# Allegro board ClassDAmp.brd
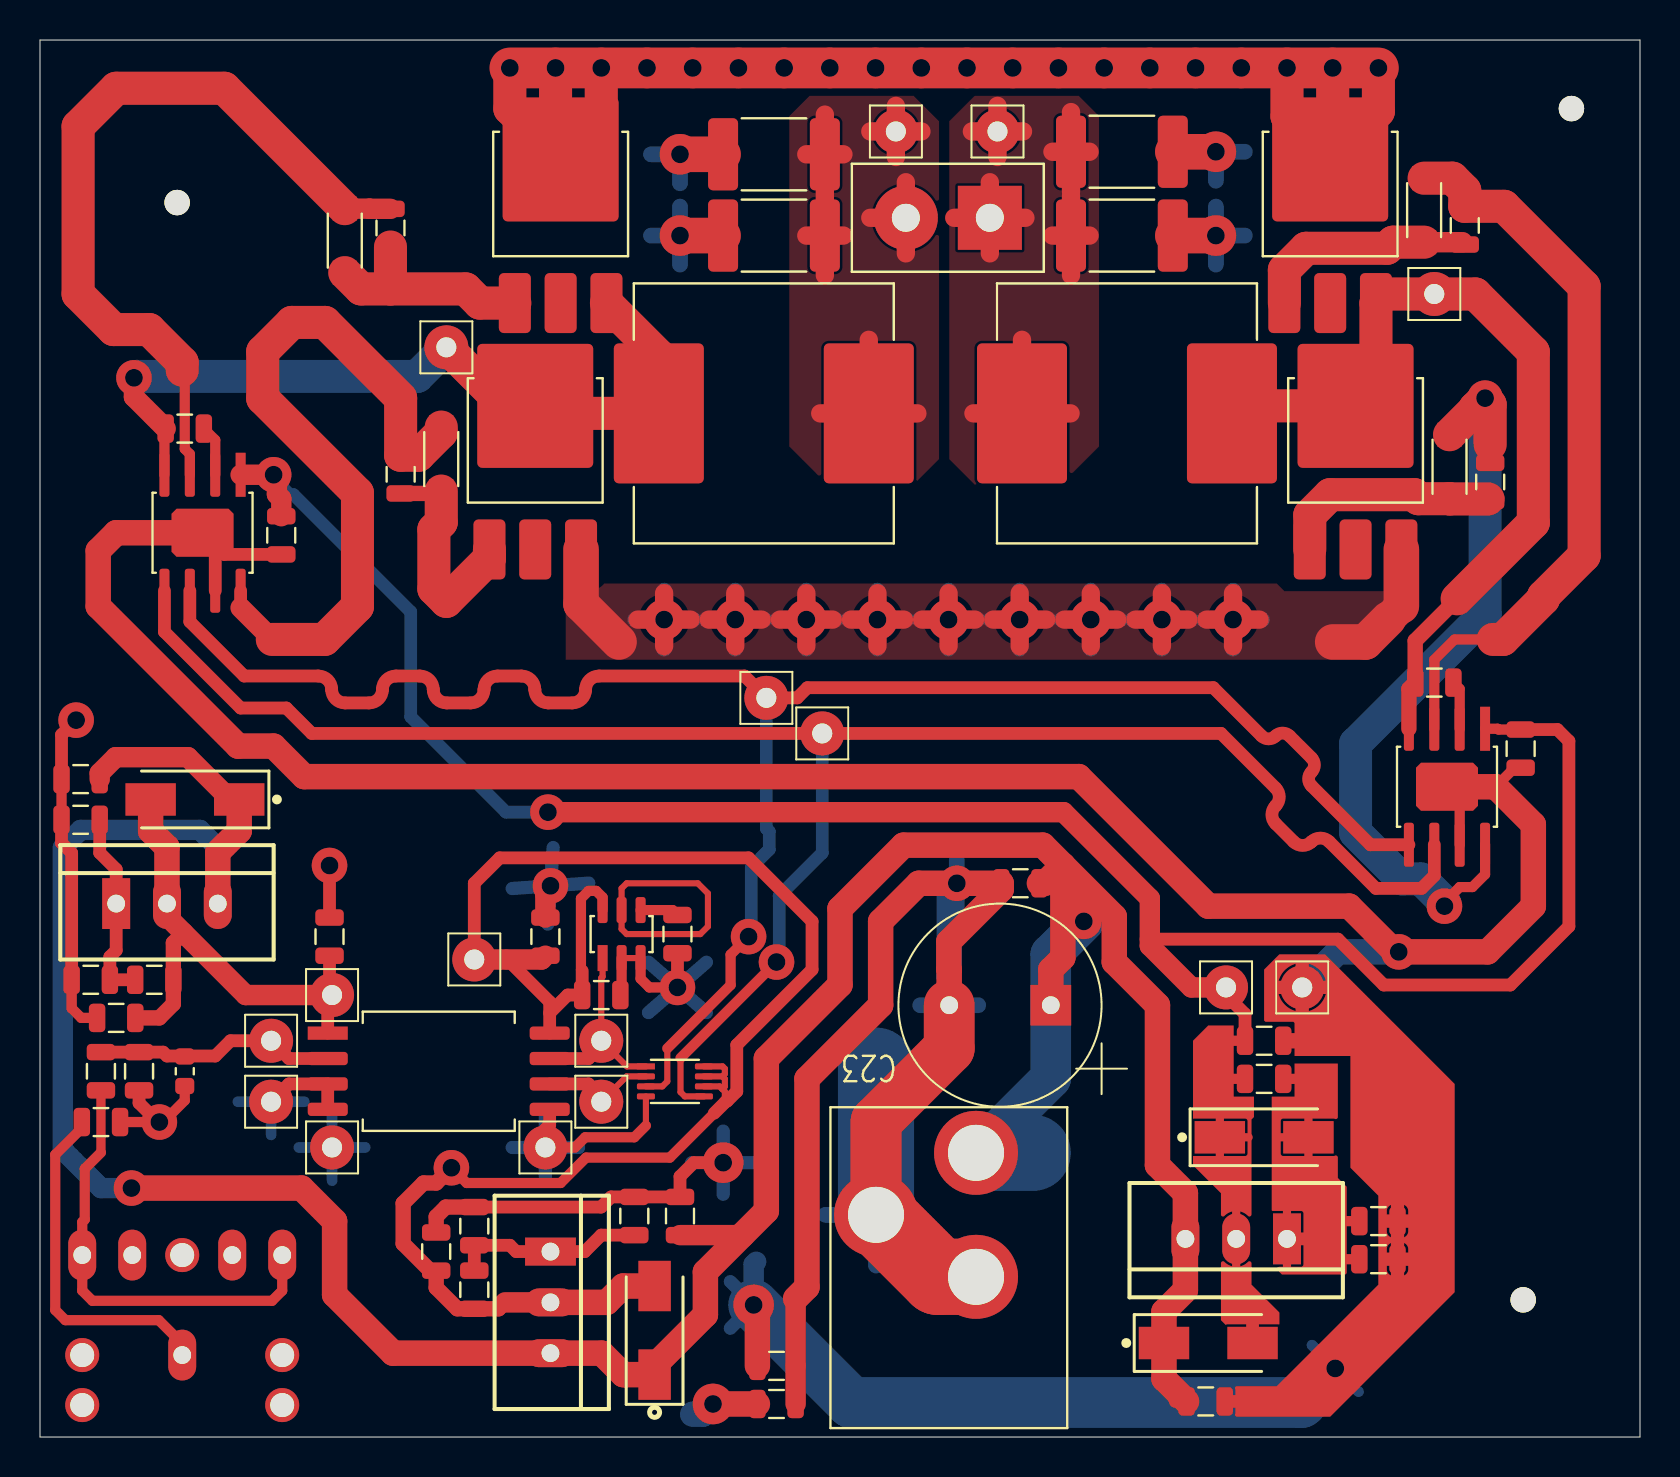
[diagram p0: board, top side]
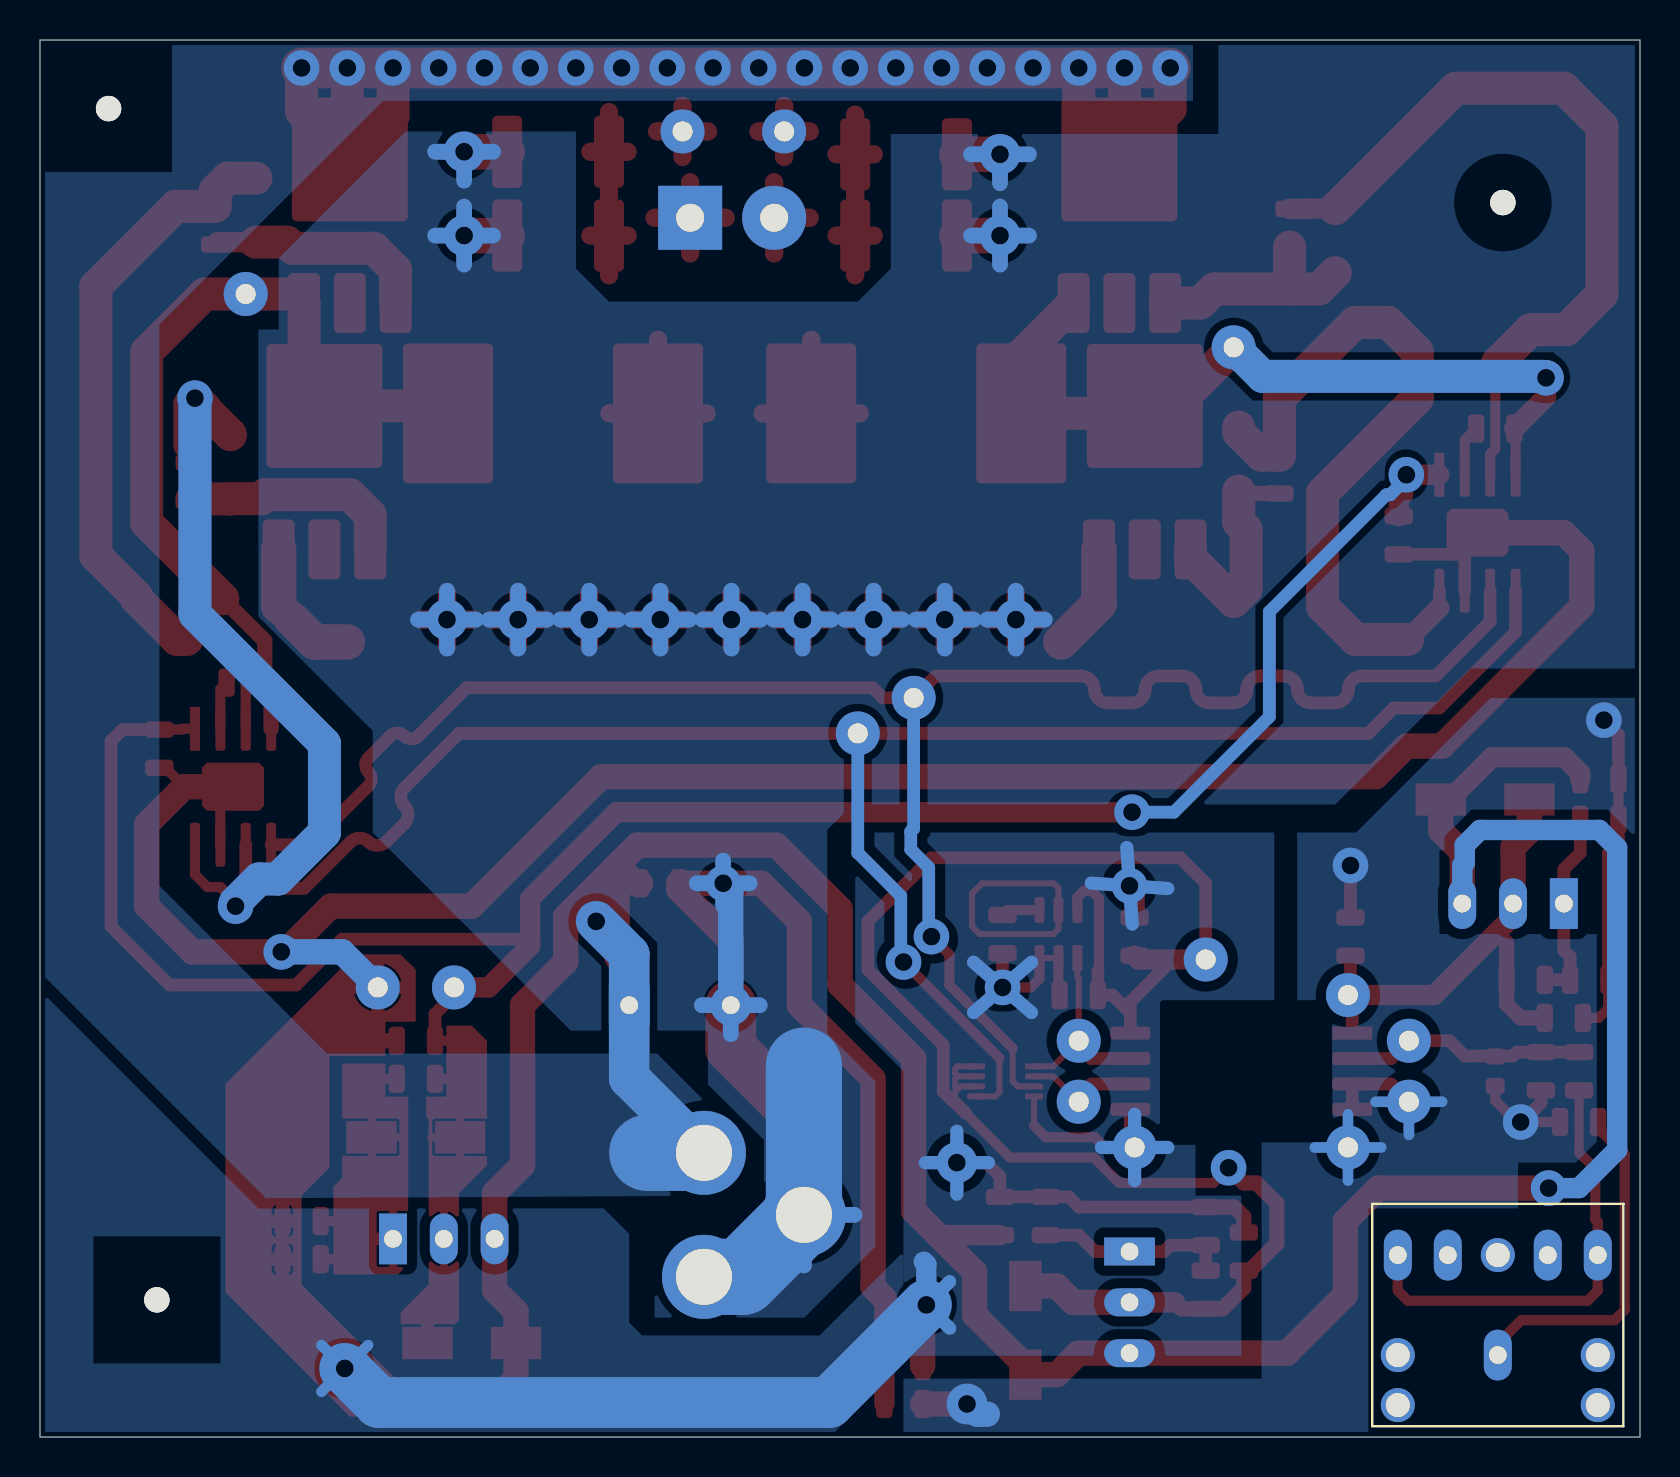
[diagram p1: board, bottom side, seen from below]

Outline 80.01 x 69.85 mm; copper layers: TOP, LAYER2, LAYER3, BOTTOM. Coordinates in mm from the lower left corner of the outline.
Outline path: 0,69.85 0,0 80.01,0 80.01,69.85 0,69.85

## Design rules (mm)
constraint set DEFAULT: min track width 0.152

## Placement (name value [footprint] x y rotation side)
C1  1n  [R0603RESC157X85X50L30N]  7.24 18.29 90 top
C2  100n  [R0805RESC200X125X50L30N]  14.48 25.02 90 top
C3  100n  [R0805RESC200X125X50L30N]  25.27 25.02 90 top
C4  100n  [R0805RESC200X125X50L30N]  28.07 22.1 180 top
C5  470n  [R0805RESC200X125X50L30N]  12.06 45.09 90 top
C6  470n  [R0805RESC200X125X50L30N]  74.04 34.42 90 top
C7  22n  [R0805RESC200X125X50L30N]  69.72 37.72 0 top
C8  22n  [R0805RESC200X125X50L30N]  7.24 50.42 180 top
C9  220n  [CAPC450X320X320L25]  36.7 64.14 0 top
C10  220n  [CAPC450X320X320L25]  54.1 64.26 180 top
C11  DNF  [CAPC450X320X320L25]  36.7 60.07 0 top
C12  DNF  [CAPC450X320X320L25]  54.1 60.07 180 top
C13  100n  [R0805RESC200X125X50L30N]  58.29 1.78 0 top
C14  1u  [R0805RESC200X125X50L30N]  61.21 19.81 0 top
C15  10u  [R0805RESC200X125X50L30N]  66.93 10.79 0 top
C16  100nF  [R0805RESC200X125X50L30N]  2.03 32.89 180 top
C17  1u  [R0805RESC200X125X50L30N]  3.81 20.95 180 top
C18  10u  [R0805RESC200X125X50L30N]  2.54 22.86 180 top
C19  1u  [R0805RESC200X125X50L30N]  19.81 9.27 90 top
C20  100n  [R0805RESC200X125X50L30N]  32 11.05 90 top
C21  10u  [R0805RESC200X125X50L30N]  21.72 10.54 90 top
C22  100n  [R0805RESC200X125X50L30N]  49.02 27.69 180 top
C23  100u  [GU-CAPCYL200]  50.55 21.59 180 top
D1  1N4148W  [GU-SOD-123FL]  15.24 59.82 270 top
D2  1N4148W  [GU-SOD-123FL]  20.07 48.9 270 top
D3  1N4148W  [GU-SOD-123FL]  70.48 48.51 270 top
D4  1N4148W  [GU-SOD-123FL]  69.22 61.34 270 top
D5  S1B  [DO-214AC]  61.21 14.99 0 top
D6  S1B  [DO-214AC]  58.42 4.7 0 top
D7  S1B  [DO-214AC]  30.73 5.33 90 top
D9  S1B  [DO-214AC]  7.75 31.88 180 top
J3  30V  [CLIFF_DC-10A_P]  51.31 0.51 90 top
J5  Output  [RHDRV2W140P420_550_2X1_960X5-1]  47.5 60.96 180 top
L1  10u  [INDM1270X1270X850L230X500]  36.2 51.18 0 top
L2  10u  [INDM1270X1270X850L230X500]  54.36 51.18 180 top
NOREF  -  [unnamed]  74.17 6.86 0 top
NOREF#2  -  [unnamed]  76.58 66.42 0 top
NOREF#3  -  [unnamed]  6.86 61.72 0 top
R1  2k  [R0805RESC200X125X50L30N]  3.05 18.29 90 top
R2  1k  [R0805RESC200X125X50L30N]  4.95 18.29 270 top
R3  2k  [R0805RESC200X125X50L30N]  3.05 15.75 0 top
R4  -  [R0805RESC200X125X50L30N]  31.88 25.15 90 top
R5  10  [R0805RESC200X125X50L30N]  17.53 60.45 270 top
R6  10  [R0805RESC200X125X50L30N]  18.03 48.13 270 top
R7  10  [R0805RESC200X125X50L30N]  71.25 60.58 90 top
R8  10  [R0805RESC200X125X50L30N]  72.52 47.75 90 top
R9  1.65k  [R0805RESC200X125X50L30N]  66.93 8.89 0 top
R10  240  [R0805RESC200X125X50L30N]  61.21 17.91 0 top
R11  240  [R0805RESC200X125X50L30N]  21.72 7.37 90 top
R12  390  [R0805RESC200X125X50L30N]  29.72 11.05 90 top
R13  240  [R0805RESC200X125X50L30N]  5.71 22.86 180 top
R14  715  [R0805RESC200X125X50L30N]  2.03 30.86 180 top
R15  SHORT  [R0805RESC200X125X50L30N]  36.83 1.65 180 top
R17  SHORT  [R0805RESC200X125X50L30N]  36.83 3.56 180 top
T1  VinP  [TESTPOINT]  11.56 19.81 0 top
T2  VinN  [TESTPOINT]  11.56 16.76 0 top
T3  test_point_0  [TESTPOINT]  14.61 22.1 0 top
T4  test_point_0  [TESTPOINT]  14.61 14.48 0 top
T5  test_point_0  [TESTPOINT]  21.72 23.88 0 top
T6  test_point_0  [TESTPOINT]  25.27 14.48 0 top
T7  CLK  [TESTPOINT]  28.07 19.81 0 top
T8  test_point_0  [TESTPOINT]  28.07 16.76 0 top
T9  SIGNAL+  [TESTPOINT]  39.12 35.18 90 top
T10  SIGNAL-  [TESTPOINT]  36.32 36.96 90 top
T11  PREFILTER+  [TESTPOINT]  20.32 54.48 0 top
T12  PREFILTER-  [TESTPOINT]  69.72 57.15 0 top
T13  SIGNAL+  [TESTPOINT]  42.8 65.28 0 top
T14  SIGNAL-  [TESTPOINT]  47.88 65.28 0 top
T15  test_point_0  [TESTPOINT]  59.31 22.48 0 top
T16  test_point_0  [TESTPOINT]  63.12 22.48 0 top
U1  PHONEJACK STEREO SW  [3-5MM-STEREO-20-0137]  7.11 6.1 90 bottom
U2  AMC1204  [SOIC8P127_585X1150X280L75X41]  19.94 18.29 270 top
U3  LTC6907  [SOT23-6P95_270X145L35X42]  29.08 25.15 0 top
U4  NC7SV74  [SOP8P50_200X310X80L25X22]  31.75 17.78 270 top
U5  UCC27211  [SOIC9P127_490X600X170L83X41T-1]  8.13 45.21 180 top
U6  UCC27211  [SOIC9P127_490X600X170L83X41T-1]  70.36 32.51 180 top
U7  MOSFET - NVD5C684NL  [DPAK4P229_990X238L159X76T480-1]  65.79 48.77 0 top
U8  MOSFET - NVD5C684NL  [DPAK4P229_990X238L159X76T480-1]  24.77 48.77 0 top
U9  MOSFET - NVD5C684NL  [DPAK4P229_990X238L159X76T480-1]  26.04 61.09 0 top
U10  MOSFET - NVD5C684NL  [DPAK4P229_990X238L159X76T480-1]  64.52 61.09 0 top
U11  LM317M  [GU-TO220AB]  62.36 9.91 180 top
U12  LM317M  [GU-TO220AB]  25.53 9.27 270 top
U13  LM317M  [GU-TO220AB]  3.81 26.67 0 top

## Library data of the parts
C1-C14 C16 C17 C19 C20 = CAP NP
C15 C18 C21 C22 = CAPACITOR NON-POL
C23 = CAPACITOR POL
D1 = DIODE_2
D2 = DIODE_3
D3 = DIODE_5
D4 = DIODE_4
D5-D7 D9 = DIODE PIN_0
J3 = CON3
J5 = HEADER 2
L1 L2 = INDUCTOR
R1-R3 R5-R15 R17 = R
R4 = R_R0805RESC200X125X50L30N_200K
T1-T16 = test_point_0
U1 = PHONEJACK STEREO SW_0
U2 = AMC1204
U3 = LTC6907
U4 = NC7SV74
U5 U6 = UCC27211_2
U7-U10 = MOSFET - NVD5C684NL_1
U11-U13 = LM317M_0

## Footprints (pads in the part's own frame, mm; a bottom-side part is the same pattern mirrored in y, then rotated)
3-5MM-STEREO-20-0137
  round 1.7 hole 1.2: (-4.5,-5) (-4.5,5) (-2,-5) (-2,5) (3,0)
  oval 2.54x1.397 hole 0.889: 1(-2,0) 2(3,5) 3(3,2.5) 4(3,-2.5) 5(3,-5)
CAPC450X320X320L25
  rrect 1.5x3.61 smd: 1(-2.545,0) 2(2.545,0)
CLIFF_DC-10A_P
  round 4.2 hole 2.8: 1(13.7,4.5) 2(10.6,9.5) 3(7.5,4.5)
DO-214AC
  rect 2.52x1.62 smd: A(2.215,0) C(-2.215,0)
DPAK4P229_990X238L159X76T480-1
  rrect 1.6x3 smd: 1(-2.29,-4.39) 2(0,-4.39) 3(2.29,-4.39)
  rrect 5.8x6.2 smd: 4(0,2.79)
GU-CAPCYL200
  rect 2.032x2.032 hole 0.889: 1(0,0)
  round 2.032 hole 0.889: 2(5.08,0)
GU-SOD-123FL
  rect 1.2x1.2 smd: A(1.6,0) C(-1.6,0)
GU-TO220AB
  rect 1.397x2.54 hole 0.889: 1(0,0)
  oval 1.397x2.54 hole 0.889: 2(2.54,0) 3(5.08,0)
INDM1270X1270X850L230X500
  rrect 4.5x7 smd: 1(-5.25,0) 2(5.25,0)
R0603RESC157X85X50L30N
  rrect 0.81x0.95 smd: 1(-0.74,0) 2(0.74,0)
R0805RESC200X125X50L30N
  rrect 0.82x1.42 smd: 1(-0.955,0) 2(0.955,0)
RHDRV2W140P420_550_2X1_960X5-1
  rect 3.2x3.2 hole 1.4: 1(0,0)
  round 3.2 hole 1.4: 2(4.2,0)
SOIC8P127_585X1150X280L75X41
  rect 0.66x2 smd: 1(-1.905,-5.55)
  rrect 0.66x2 smd: 2(-0.635,-5.55) 3(0.635,-5.55) 4(1.905,-5.55) 5(1.905,5.55) 6(0.635,5.55) 7(-0.635,5.55) 8(-1.905,5.55)
SOIC9P127_490X600X170L83X41T-1
  rect 0.5x2.2 smd: 1(-1.905,-2.9)
  rrect 0.5x2.2 smd: 2(-0.635,-2.9) 3(0.635,-2.9) 4(1.905,-2.9) 5(1.905,2.9) 6(0.635,2.9) 7(-0.635,2.9) 8(-1.905,2.9)
  rrect 3.1x2.4 smd: 9(0,0)
SOP8P50_200X310X80L25X22
  rect 0.3x0.9 smd: 1(-0.75,-1.45)
  rrect 0.3x0.9 smd: 2(-0.25,-1.45) 3(0.25,-1.45) 4(0.75,-1.45) 5(0.75,1.45) 6(0.25,1.45) 7(-0.25,1.45) 8(-0.75,1.45)
SOT23-6P95_270X145L35X42
  rect 0.5x1.3 smd: 1(-0.95,-1.2)
  rrect 0.5x1.3 smd: 2(0,-1.2) 3(0.95,-1.2) 4(0.95,1.2) 5(0,1.2) 6(-0.95,1.2)
TESTPOINT
  round 2.2 hole 1: 1(0,0)
unnamed
  round 1.27 hole 3.962 unplated: (0,0)

## Nets
3V3: C3.1 C4.2 C19.1 D7.A R11.1 T5.1 U2.8 U3.6(V+) U4.6 U4.7 U4.8(VCC) U12.2(OUTPUT)
5V: C2.1 C17.1 D9.A R13.1 T3.1 U2.1 U13.2(OUTPUT)
10V: C5.2 C6.2 C14.1 D5.C(K) D6.A R10.1 T15.1 U5.1 U6.1 U11.2(OUTPUT)
GND1: C1.1 C2.2 C16.2 C17.2 C18.2 R2.2 R3.2 R14.2 R15.2 T2.1 T4.1 U2.3 U2.4
GND2: C9.1 C10.1 C11.1 C12.1 C22.2 C23.2 J3.2 J3.3 R15.1 R17.1 U7.3(S) U8.3(S)
GND3: C3.2 C4.1 C5.1 C6.1 C13.2 C14.2 C15.2 C19.2 C20.2 C21.2 R4.1 R9.2 R12.2 R17.2 T6.1 T16.1 U2.5 U3.2 U3.3 U4.4 U5.7(VSS) U5.9 U6.7(VSS) U6.9
+V_RAIL: C13.1 C16.1 C20.1 C22.1 C23.1 D6.C(K) D7.C(K) D9.C(K) J3.1 U9.4 U10.4 U11.3 U12.3 U13.3
CLK: T7.1 U2.7 U3.1 U4.1
D: U7.2 U8.2 U9.2 U10.2
MOD_SIGNAL: T8.1 U2.6 U4.2
PREFILTER+: C8.2 L1.1 T11.1 U5.4 U8.4 U9.3(S)
PREFILTER-: C7.1 L2.1 T12.1 U6.4 U7.4 U10.3(S)
SIGNAL+: T9.1 U4.5 U5.5 U6.6
SIGNAL-: T10.1 U4.3 U5.6 U6.5
N08313: R1.1 U1.2 U1.5
N08317: R3.1 U1.1(E)
N08321: C1.2 R1.2 R2.1 T1.1 U2.2(VINP)
N11549: R4.2 U3.4
N14416: D3.C(K) R8.2 U6.8
N14431: D4.C(K) R7.2 U6.3
N14441: D1.C(K) R5.1 U5.3
N14452: D2.C(K) R6.1 U5.8
N14665: D4.A R7.1 U10.1
N14669: D3.A R8.1 U7.1
N14687: D1.A R5.2 U9.1
N14691: D2.A R6.2 U8.1
N16540: C8.1 U5.2
N16584: C7.2 U6.2
N20136: C9.2 C11.2 J5.2 L1.2 T13.1
N20333: C10.2 C12.2 J5.1 L2.2 T14.1
N24103: C15.1 D5.A R9.1 R10.2 U11.1
N25160: C21.1 R11.2 R12.1 U12.1
N25746: C18.1 R13.2 R14.1 U13.1

Pads without a net: U1 3 4; U3 5

## Via types
v1: diameter 1.778, hole 0.889, TOP to BOTTOM, 37 vias
v2: diameter 2.032, hole 0.889, TOP to BOTTOM, 17 vias

## Routing (per net, layer and track width the routed paths; a pad name or vN(x,y) marks a point on that pad's centre or on a via; arc(x,y) is an arc through that point)
3V3: length 91.1
  TOP w0.305: 34.12,17.4 34.25,17.27 34.25,16.72 ; 34.12,17.4 34.25,17.53 34.25,17.91 34.12,18.03 ; 34.12,17.4 33.99,17.53 U4.6 ; 34.12,18.03 34.25,18.15 34.25,18.41 34.13,18.53 U4.8 ; 34.12,18.03 U4.7
  TOP w0.508: 27.11,23.31 27.05,23.37 27.05,26.92 27.43,27.3 27.81,27.3 28.13,26.98 U3.6 ; 33.72,16.19 31.5,13.97 27.3,13.97 26.04,12.7 21.34,12.7 v1(20.57,13.46)
  TOP w0.635: 27.11,23.31 C4.2 26.38,22.1 25.49,21.2 ; T5.1 21.72,27.69 22.99,28.96 35.43,28.96 38.61,25.78 38.61,23.37 34.84,19.6 34.84,17.28 34.37,16.8 34.33,16.8 33.72,16.19 ; 23.26,23.88 23.37,23.88 25.49,21.76 25.49,21.2 ; 25.49,21.2 U2.8
  TOP w0.762: 23.26,6.73 22.94,6.41 R11.1 20.87,6.41 19.81,7.47 C19.1 19.51,8.32 18.16,9.67 18.16,11.68 19.18,12.7 19.81,12.7 v1(20.57,13.46)
  TOP w1.016: C3.1 25.09,23.88 23.37,23.88 ; T5.1 23.26,23.88 ; 23.26,6.73 U12.2
  TOP w1.27: U12.2 28.34,6.73 29.16,7.55 D7.A
5V: length 26.4
  TOP w0.635: 14.73,22.1 T3.1 ; 14.73,22.1 14.39,21.76 U2.1 ; 14.73,22.1 14.48,22.35 C2.1
  TOP w0.762: 7.18,25.21 6.67,24.7 R13.1 6.67,21.66 5.97,20.95 C17.1
  TOP w1.016: T3.1 10.29,22.1 6.22,26.16 6.22,26.54 U13.2
  TOP w1.27: U13.2 6.35,29.49 5.53,30.3 D9.A
10V: length 116.4
  TOP w0.406: 59.82,11.35 U11.2 59.82,8.46 ; 59,14 D5.C ; D5.C 60.44,14.99 ; D5.C 59,15.97
  TOP w0.508: C6.2 72.93,35.37 72.89,35.41 U6.1 ; C14.1 59.05,19.81 ; R10.1 59.05,17.91
  TOP w0.635: C14.1 60.26,21.15 59.31,22.1 T15.1 ; D6.A 60.63,5.79 ; C6.2 75.88,35.37 76.45,34.8 76.45,25.53 73.53,22.6 67.2,22.6 64.9,24.89 55.5,24.89
  TOP w1.016: T15.1 57.57,22.48 55.5,24.55 55.5,26.92 51.18,31.24 v1(25.4,31.24) ; C5.2 12.06,46.92 11.85,47.14 11.85,47.76 11.68,47.92 v1(11.68,48.11) U5.1
  BOTTOM w0.635: v1(11.68,48.11) 11.68,47.92 12.49,47.11 12.68,47.11 18.54,41.26 18.54,36.01 23.3,31.24 v1(25.4,31.24)
GND1: length 44.9
  TOP w0.508: R14.2 C16.2 ; C17.2 2.06,20.95 1.58,21.43 C18.2 ; C1.1 7.24,16.83 6.16,15.75 v1(5.97,15.75) R3.2
  TOP w0.635: v1(1.81,35.84) 1.08,35.11 C16.2 ; U2.4 U2.3 12.45,17.65 T2.1 ; R14.2 1.08,29.71 1.58,29.2 C18.2 ; C2.2 v1(14.48,28.57) ; 5.9,15.75 4.95,16.7 R2.2
  TOP w1.27: R15.2 v2(33.66,1.65)
  BOTTOM w0.533: T4.1 16.26,14.48 ; T4.1 12.95,14.48 ; T4.1 14.61,16.14 ; T4.1 14.61,12.82 ; 11.56,15.1 T2.1 ; T2.1 13.22,16.76 ; T2.1 9.9,16.76
  BOTTOM w1.27: 32.64,1.14 33.15,1.14 v2(33.66,1.65)
GND2: length 233.5
  TOP w0.914: 38.32,39.55 v2(38.32,40.87) ; v2(38.32,40.87) 39.64,40.87 ; v2(38.32,40.87) 38.32,42.19 ; v2(38.32,40.87) 37,40.87 ; 29.89,40.87 v2(31.21,40.87) ; v2(31.21,40.87) 31.21,39.55 ; v2(31.21,40.87) 32.53,40.87 ; v2(31.21,40.87) 31.21,42.19 ; v2(48.99,40.87) 50.31,40.87 ; v2(48.99,40.87) 48.99,42.19 ; v2(48.99,40.87) 48.99,39.55 ; v2(48.99,40.87) 47.67,40.87 ; v2(52.55,40.87) 52.55,42.19 ; v2(52.55,40.87) 51.22,40.87 ; v2(52.55,40.87) 52.55,39.55 ; v2(52.55,40.87) 53.87,40.87 ; v2(34.77,40.87) 36.09,40.87 ; v2(34.77,40.87) 34.77,39.55 ; v2(34.77,40.87) 33.44,40.87 ; v2(34.77,40.87) 34.77,42.19 ; v2(56.1,40.87) 57.42,40.87 ; v2(56.1,40.87) 56.1,39.55 ; v2(56.1,40.87) 54.78,40.87 ; v2(56.1,40.87) 56.1,42.19 ; v2(45.43,40.87) 46.76,40.87 ; v2(45.43,40.87) 45.43,42.19 ; v2(45.43,40.87) 44.11,40.87 ; v2(45.43,40.87) 45.43,39.55 ; 41.88,39.55 v2(41.88,40.87) ; v2(41.88,40.87) 43.2,40.87 ; v2(41.88,40.87) 40.56,40.87 ; v2(41.88,40.87) 41.88,42.19 ; v2(59.66,40.87) 59.66,42.19 ; v2(59.66,40.87) 59.66,39.55 ; v2(59.66,40.87) 60.98,40.87 ; v2(59.66,40.87) 58.34,40.87
  TOP w1.016: 37.79,6.92 R17.1 37.79,1.65
  TOP w1.27: C23.2 45.47,23.37 45.45,23.39 45.45,24.77 48.07,27.39 C22.2 v1(45.85,27.69) 43.94,27.69 42.04,25.78 42.04,21.59 38.35,17.91 38.35,7.49 37.79,6.92
  TOP w1.651: 67.42,40.89 68.08,41.55
  TOP w1.778: 64.64,39.75 66.28,39.75 67.42,40.89 ; C11.1 v2(32,60.07) ; 68.08,41.55 U7.3 ; U8.3 27.06,41.65 28.96,39.75 ; C12.1 v2(58.8,60.07) ; C9.1 v2(32,64.14) ; C10.1 v2(58.8,64.26)
  TOP w2.54: J3.2 41.81,15.77 45.47,19.43 C23.2
  TOP w3.81: J3.2 44.91,8.01 J3.3
  BOTTOM w0.787: v2(52.55,40.87) 52.55,42.32 ; v2(52.55,40.87) 52.55,39.42 ; v2(52.55,40.87) 53.99,40.87 ; v2(52.55,40.87) 51.1,40.87 ; 48.99,39.42 v2(48.99,40.87) ; v2(48.99,40.87) 47.54,40.87 ; v2(48.99,40.87) 50.44,40.87 ; v2(48.99,40.87) 48.99,42.32 ; v2(38.32,40.87) 39.77,40.87 ; v2(38.32,40.87) 36.87,40.87 ; v2(38.32,40.87) 38.32,42.32 ; v2(38.32,40.87) 38.32,39.42 ; 32,58.62 v2(32,60.07) ; v2(32,60.07) 32,61.52 ; v2(32,60.07) 33.45,60.07 ; v2(32,60.07) 30.56,60.07 ; 44.53,27.69 v1(45.85,27.69) ; v1(45.85,27.69) 47.17,27.69 ; v1(45.85,27.69) 45.85,28.82 ; v1(45.85,27.69) 45.85,26.56 ; 32,62.69 v2(32,64.14) ; v2(32,64.14) 33.45,64.14 ; v2(32,64.14) 30.56,64.14 ; v2(58.8,64.26) 60.25,64.26 ; v2(58.8,64.26) 58.8,62.81 ; v2(58.8,64.26) 57.35,64.26 ; v2(31.21,40.87) 32.66,40.87 ; v2(31.21,40.87) 31.21,42.32 ; v2(31.21,40.87) 29.76,40.87 ; v2(31.21,40.87) 31.21,39.42 ; 45.47,20.14 C23.2 ; C23.2 44.02,21.59 ; C23.2 46.91,21.59 ; 56.1,39.42 v2(56.1,40.87) ; v2(56.1,40.87) 56.1,42.32 ; v2(56.1,40.87) 57.55,40.87 ; v2(56.1,40.87) 54.65,40.87 ; 43.99,40.87 v2(45.43,40.87) ; v2(45.43,40.87) 46.88,40.87 ; v2(45.43,40.87) 45.43,42.32 ; v2(45.43,40.87) 45.43,39.42 ; 40.43,40.87 v2(41.88,40.87) ; v2(41.88,40.87) 41.88,42.32 ; v2(41.88,40.87) 43.33,40.87 ; v2(41.88,40.87) 41.88,39.42 ; v2(34.77,40.87) 36.21,40.87 ; v2(34.77,40.87) 34.77,39.42 ; v2(34.77,40.87) 34.77,42.32 ; v2(34.77,40.87) 33.32,40.87 ; 58.21,40.87 v2(59.66,40.87) ; v2(59.66,40.87) 59.66,42.32 ; v2(59.66,40.87) 59.66,39.42 ; v2(59.66,40.87) 61.11,40.87 ; v2(58.8,60.07) 60.25,60.07 ; v2(58.8,60.07) 58.8,58.62 ; v2(58.8,60.07) 58.8,61.52 ; v2(58.8,60.07) 57.35,60.07 ; 39.28,11.11 J3.2 41.81,8.58
  BOTTOM w1.27: v1(45.85,27.69) 45.47,27.3 C23.2
  BOTTOM w3.81: J3.3 44.91,8.01 J3.2 41.81,18.57
GND3: length 237.7
  TOP w0.305: 30.3,15.57 U4.4 ; U3.2 U3.3
  TOP w0.508: C6.1 73.74,33.46 72.79,32.51 ; U3.2 29.08,22.16 C4.1 ; v1(31.88,22.48) 30.47,22.48 30.03,22.92 U3.3 ; U6.9 70.99,31.88 70.99,29.61 ; 30.3,15.57 29.72,14.99 27.26,14.99 26.75,14.48 T6.1
  TOP w0.635: U2.5 25.49,15.61 25.27,15.39 T6.1 ; 63.21,19.81 63.88,19.81 ; v1(31.88,22.48) R4.1 ; 8.76,44.58 9.21,44.13 C5.1 ; 8.76,44.58 U5.9 ; 8.76,44.58 U5.7 ; C21.2 28.06,11.5 28.56,12 R12.2 C20.2 32,13.03 32.69,13.72 v2(34.16,13.72) ; C13.2 60.45,1.78
  TOP w0.66: 61.84,22.48 T16.1 ; T16.1 63.12,21.2 ; T16.1 64.4,22.48 ; T16.1 63.12,23.76 ; R9.2 67.88,9.78 ; R9.2 67.3,8.89 ; R9.2 68.47,8.89 ; R9.2 67.88,8 ; C15.2 68.47,10.79 ; C15.2 67.88,9.91 ; C15.2 67.3,10.79 ; C15.2 67.88,11.68
  TOP w0.762: v1(25.53,27.56) 25.53,27.36 25.27,27.1 ; 63.21,19.81 C14.2 ; C19.2 19.81,11.02 20.29,11.5 C21.2
  TOP w1.016: C3.2 25.27,27.3 v1(25.53,27.56)
  TOP w1.27: v2(35.69,6.6) 35.87,6.42 R17.2 ; U5.9 3.81,45.21 2.91,44.31 2.91,41.54 9.91,34.54 11.68,34.54 13.21,33.02 51.94,33.02 58.42,26.54 65.47,26.54 67.75,24.26 v1(67.94,24.26) 72.39,24.26 74.68,26.54 74.68,30.63 72.79,32.51 U6.9
  BOTTOM w0.533: v2(64.77,3.43) 65.93,2.26 ; v2(64.77,3.43) 65.93,4.59 ; v2(64.77,3.43) 63.61,4.59
  BOTTOM w0.66: 34.16,12.14 v2(34.16,13.72) ; v2(34.16,13.72) 35.74,13.72 ; v2(34.16,13.72) 32.59,13.72 ; v2(34.16,13.72) 34.16,15.29 ; 23.61,27.42 v1(25.53,27.56) ; v1(25.53,27.56) 25.66,29.47 ; v1(25.53,27.56) 25.39,25.65 ; v1(25.53,27.56) 27.44,27.69 ; T6.1 25.27,16.14 ; T6.1 26.93,14.48 ; T6.1 23.61,14.48 ; T6.1 25.27,12.82 ; v1(31.88,22.48) 33.33,21.22 ; v1(31.88,22.48) 33.33,23.74 ; v1(31.88,22.48) 30.43,23.74 ; v1(31.88,22.48) 30.43,21.22 ; 34.52,7.77 v2(35.69,6.6) 34.52,5.44
  BOTTOM w1.016: 35.81,8.76 35.69,8.64 v2(35.69,6.6)
  BOTTOM w1.27: T16.1 64.9,24.26 v1(67.94,24.26)
  BOTTOM w2.54: v2(64.77,3.43) 63.06,1.72 40.57,1.72 v2(35.69,6.6)
+V_RAIL: length 253.6
  TOP w0.508: 51.15,27.3 50.77,27.69 50.25,27.69
  TOP w0.635: C13.1 56.77,1.78
  TOP w1.016: 35.11,10.09 C20.1 ; C16.1 2.99,33.19 3.78,33.99 7.4,33.99 9.51,31.88 D9.C
  TOP w1.27: C22.1 50.25,27.69 51.15,28.59 ; v1(4.57,12.45) 13.08,12.45 14.73,10.79 14.73,7.11 17.65,4.19 U12.3 28.09,4.19 29.16,3.12 D7.C 30.73,3.57 33.27,6.11 33.27,8.26 36.32,11.3 36.32,18.92 40.01,22.61 40.01,26.42 43.18,29.59 50.15,29.59 51.15,28.59 ; D9.C 9.96,30.3 8.89,29.23 U13.3 ; 51.15,27.3 52.2,26.26 v1(52.2,25.78) ; 51.15,27.3 51.15,28.59 ; 51.15,27.3 51.15,23.97 50.55,23.37 C23.1 ; 51.15,28.59 53.72,26.02 53.72,23.75 55.88,21.59 55.88,13.59 57.28,12.19 U11.3 57.28,7.34 56.21,6.27 D6.C 56.21,2.91 C13.1
  TOP w1.651: 64.64,64 66.93,66.29 v1(66.93,68.45) ; 64.64,64 U10.4 62.36,66.04 v1(62.36,68.45) ; 64.64,64 v1(64.64,68.45) ; 25.78,64.13 v1(25.78,68.45) ; 25.78,64.13 U9.4 28.07,65.91 v1(28.07,68.45) ; 25.78,64.13 23.5,66.42 v1(23.5,68.45)
  TOP w2.032: v1(66.93,68.45) v1(64.64,68.45) v1(62.36,68.45) v1(60.07,68.45) v1(57.78,68.45) v1(55.5,68.45) v1(53.21,68.45) v1(50.93,68.45) v1(48.64,68.45) v1(46.35,68.45) v1(44.07,68.45) v1(41.78,68.45) v1(39.5,68.45) v1(37.21,68.45) v1(34.92,68.45) v1(32.64,68.45) v1(30.35,68.45) v1(28.07,68.45) v1(25.78,68.45) v1(23.5,68.45)
  BOTTOM w1.016: U13.3 8.89,28.57 8.76,28.7 8.76,29.59 8,30.35 2.03,30.35 1.14,29.46 1.14,14.35 3.05,12.45 v1(4.57,12.45)
  BOTTOM w2.032: J3.1 50.55,17.95 C23.1 50.55,24.13 v1(52.2,25.78)
  BOTTOM w3.81: J3.1 49.64,14.21
CLK: length 10
  TOP w0.305: U3.1 28.13,23.02 28.07,22.95 T7.1 29.35,18.53 U4.1
  TOP w0.635: U2.7 27.43,18.92 28.07,19.56 T7.1
MOD_SIGNAL: length 5.9
  TOP w0.305: T8.1 29.33,18.03 U4.2
  TOP w0.635: T8.1 28.07,17.02 27.43,17.65 U2.6
Net_35: length 12.9
  TOP w0.305: 32.89,27.69 29.34,27.69 29.08,27.43 29.08,26.35 29.08,25.4 29.34,25.15 33.02,25.15 33.4,25.53 33.4,27.18 32.89,27.69
PREFILTER+: length 40.4
  TOP w0.508: U5.4 6.22,50.36 C8.2
  TOP w1.016: v1(4.7,52.96) 4.7,52 C8.2
  TOP w1.651: T11.1 23.25,51.56 U8.4 25.14,51.18 L1.1 30.95,54.08 U9.3
  BOTTOM w1.651: T11.1 18.87,53.03 4.84,53.03 4.76,52.96 v1(4.7,52.96)
PREFILTER-: length 42.6
  TOP w0.762: U6.4 68.45,37.4 C7.1 68.77,39.81 70.87,41.91
  TOP w1.651: 59.98,51.56 U7.4 66.81,52.58 U10.3 67.26,57.15 T12.1 71.78,57.15 74.68,54.25 74.68,45.72 70.87,41.91
  TOP w3.81: L2.1 59.98,51.56
SIGNAL+: length 96.2
  TOP w0.305: 32.03,18.95 32.03,17.25 32.25,17.03 U4.5
  TOP w0.508: v1(36.83,23.75) 32.03,18.95
  TOP w0.635: U6.6 69.72,28.07 69.09,27.43 66.8,27.43 64.47,29.76 arc(64.03,29.95) 63.58,29.76 arc(63.14,29.58) 62.69,29.76 61.79,30.67 arc(61.6,31.11) 61.79,31.56 61.79,31.56 arc(61.97,32) 61.79,32.45 59.05,35.18 T9.1 13.59,35.18 12.32,36.45 10.03,36.45 6.22,40.26 U5.5
  BOTTOM w0.635: T9.1 39.12,29.2 36.96,27.05 36.96,23.88 v1(36.83,23.75)
SIGNAL-: length 95.8
  TOP w0.305: 31.37,19.43 31.37,17.78 31.12,17.53 U4.3
  TOP w0.508: v1(35.43,25.02) 34.53,24.12 34.53,22.6 31.37,19.43
  TOP w0.635: U5.6 7.49,40.77 10.21,38.05 13.91,38.05 arc(14.39,37.85) 14.58,37.38 arc(14.78,36.9) 15.26,36.7 16.45,36.7 arc(16.93,36.9) 17.12,37.38 arc(17.32,37.85) 17.8,38.05 18.99,38.05 arc(19.47,37.85) 19.66,37.38 arc(19.86,36.9) 20.34,36.7 21.53,36.7 arc(22.01,36.9) 22.2,37.38 arc(22.4,37.85) 22.88,38.05 24.07,38.05 arc(24.55,37.85) 24.74,37.38 arc(24.94,36.9) 25.42,36.7 26.61,36.7 arc(27.09,36.9) 27.28,37.38 arc(27.48,37.85) 27.96,38.05 35.23,38.05 T10.1 37.87,36.96 38.37,37.47 58.67,37.47 61.09,35.05 arc(61.44,34.91) 61.79,35.05 arc(62.14,35.2) 62.49,35.05 63.58,33.95 arc(63.73,33.6) 63.58,33.25 arc(63.44,32.91) 63.58,32.56 66.53,29.61 U6.5
  BOTTOM w0.635: T10.1 36.32,30.42 36.47,30.28 36.47,29.38 35.57,28.48 35.57,25.15 v1(35.43,25.02)
N08313: length 22.6
  TOP w0.457: R1.1 3.05,14.22
  TOP w0.508: U1.2 12.11,7.32 11.6,6.81 2.62,6.81 2.11,7.32 U1.5 2.11,10.75 2.24,10.87 2.24,13.42 3.05,14.22
N08317: length 17.6
  TOP w0.508: U1.1 7.11,4.67 5.94,5.84 1.27,5.84 0.76,6.35 0.76,14.12 2.09,15.45 R3.1
N08321: length 12.1
  TOP w0.635: R1.2 R2.1 6.16,19.24 6.35,19.05 7.22,19.05 ; 7.22,19.05 C1.2 ; 7.22,19.05 8.76,19.05 9.53,19.81 T1.1 12.45,18.92 U2.2
N11549: length 1.9
  TOP w0.508: U3.4 31.63,26.35 R4.2
N14416: length 40.7
  TOP w0.508: U6.8 72.26,28.13 71.63,27.5 70.99,27.5 70.23,26.73 v1(70.23,26.54)
  TOP w0.762: 72.52,49.62 R8.2
  TOP w1.651: 72.23,51.91 71.76,51.44 71.76,51.39 D3.C ; 72.23,51.91 v1(72.26,51.94) ; 72.23,51.91 72.52,51.62 72.52,49.62
  BOTTOM w1.651: v1(72.26,51.94) 72.26,41.15 65.79,34.67 65.79,30.23 68.11,27.9 69.06,27.9 70.23,26.73 v1(70.23,26.54)
N14431: length 37.3
  TOP w0.508: 72.67,39.88 70.74,39.88 69.72,38.86 U6.3
  TOP w1.651: D4.C 70.63,62.94 71.25,62.32 R7.2 73.21,61.53 77.22,57.53 77.22,44.07 75.18,42.04 75.18,41.91 73.15,39.88 72.67,39.88
N14441: length 39.7
  TOP w0.508: 7.11,53.34 7.24,53.21 7.24,49.4 7.49,49.15 U5.3
  TOP w1.016: R5.1 16.48,61.41 16.47,61.42 D1.C
  TOP w1.651: D1.C 9.22,67.44 3.81,67.44 1.91,65.53 1.91,57.15 3.68,55.37 5.46,55.37 7.11,53.72 7.11,53.34
N14452: length 37.4
  TOP w0.635: U5.8 10.03,41.46
  TOP w1.016: 10.03,41.46 11.62,39.88
  TOP w1.651: D2.C 20.07,50.23 18.93,49.09 R6.1 18.03,51.94 14.25,55.73 12.6,55.73 11.14,54.27 11.14,51.93 15.88,47.19 15.88,41.53 14.22,39.88 11.62,39.88
N14665: length 11.3
  TOP w0.762: 71.13,59.74 R7.1
  TOP w1.016: D4.A 71.13,59.74
  TOP w1.651: U10.1 62.23,58.35 63.31,59.44 67.36,59.44 67.66,59.74 D4.A
N14669: length 11.7
  TOP w0.508: 72.41,46.9 R8.1 ; 63.5,44 U7.1
  TOP w1.651: U7.1 63.5,46.1 64.52,47.12 68.73,47.12 68.93,46.91 D3.A 70.5,46.9 72.41,46.9
N14687: length 11.2
  TOP w1.651: R5.2 17.53,57.4 ; 17.53,57.4 21.29,57.4 21.99,56.7 U9.1 ; 17.53,57.4 16.05,57.4 D1.A
N14691: length 11.5
  TOP w0.508: 19.95,47.18 D2.A
  TOP w0.762: R6.2 19.95,47.18
  TOP w1.651: U8.1 22.47,43.94 20.32,41.78 19.7,42.41 19.7,45.37 20.07,45.74 D2.A
N16540: length 2.5
  TOP w0.508: U5.2 8.76,49.85 C8.1
N16584: length 2.4
  TOP w0.508: 70.99,35.41 70.99,37.4 C7.2
N20136: length 30.6
  TOP w0.914: 41.52,60.96 J5.2 ; J5.2 43.3,59.18 ; J5.2 43.3,62.74 ; C9.2 39.25,66.12 ; C9.2 40.18,64.14 ; C9.2 38.32,64.14 ; C9.2 39.25,62.15 ; C11.2 39.25,62.05 ; C11.2 40.18,60.07 ; C11.2 38.32,60.07 ; C11.2 39.25,58.09 ; L1.2 41.44,54.86 ; L1.2 39.02,51.18 ; L1.2 43.87,51.18 ; 42.8,64 T13.1 ; T13.1 42.8,66.56 ; T13.1 41.52,65.28 ; T13.1 44.08,65.28
N20333: length 32.4
  TOP w0.914: T14.1 49.16,65.28 ; T14.1 47.88,64 ; T14.1 47.88,66.56 ; T14.1 46.6,65.28 ; C12.2 52.49,60.07 ; C12.2 50.63,60.07 ; C12.2 51.56,62.05 ; C12.2 51.56,58.09 ; 51.56,62.28 C10.2 ; C10.2 52.49,64.26 ; C10.2 51.56,66.25 ; C10.2 50.63,64.26 ; L2.2 51.53,51.18 ; L2.2 49.11,54.86 ; L2.2 46.68,51.18 ; J5.1 49.28,60.96 ; J5.1 47.5,59.18 ; J5.1 47.5,62.74 ; J5.1 45.72,60.96
N24103: length 11.1
  TOP w0.406: 62.36,8.46 U11.1 62.36,11.35 ; 63.43,14 D5.A ; D5.A 61.99,14.99 ; D5.A 63.43,15.97
  TOP w0.508: 64.58,10.79 C15.1 ; R10.2 62.99,17.91 ; R9.1 64.71,8.89
  TOP w0.635: 63.69,9.91 U11.1
N25160: length 9.7
  TOP w0.635: R12.1 28.06,10.09 27.24,9.27 U12.1 23.81,9.27 23.5,9.59 C21.1 R11.2
N25746: length 9.7
  TOP w0.635: R13.2 C18.1 3.5,24.01 3.81,24.33 U13.1 3.81,28.38 2.99,29.21 R14.1

## Copper pours and planes (outline as drawn; the poured copper is in the pictures)
10V on TOP (solid shape): 60.52,8.78 60.58,8.68 60.58,7.62 61.98,6.22 61.98,5.63 61.89,5.64 59.38,5.64 59.35,5.63 59.32,5.62 59.29,5.61 59.05,5.84 59.05,8.68 59.12,8.78 59.23,8.75 59.82,8.51 60.41,8.75
10V on TOP (solid shape): 59.69,17.02 60.71,17.02 60.71,16 60.58,15.88 60.58,11.13 60.52,11.03 60.41,11.06 59.82,11.3 59.23,11.06 59.12,11.03 59.05,11.13 59.05,12.19 57.66,13.59 57.66,14.05 57.74,14.05 60.26,14.05 60.35,14.09 60.39,14.18 60.39,15.8 60.35,15.89 60.26,15.92 57.74,15.92 57.66,15.92 57.66,19.81 58.42,20.57 59.69,20.57
GND1 on BOTTOM: 6.1,11.43 6.1,13.72 3.17,13.72 0.25,16.64 0.25,36.96 7.46,36.96 14.2,30.23 17.14,30.23 17.14,21.84 15.42,21.84 15.37,14.73 18.92,14.73 18.92,2.92 36.83,2.92 36.83,0.25 13.59,0.25 13.59,11.43 ; 1 cut-out
GND2 on TOP: 26.29,38.86 66.29,38.86 67.56,40.13 67.56,42.29 62.23,42.29 61.85,42.67 26.29,42.67
GND2 on BOTTOM: 15.24,31.62 8.45,38.42 0.32,38.42 0.25,38.48 0.25,69.6 21.08,69.6 21.08,65.15 37.47,65.15 37.47,58.42 39.12,56.77 51.56,56.77 53.21,58.42 53.21,65.28 61.72,65.28 68.07,58.93 68.07,55.37 69.09,55.37 69.09,41.02 63.37,35.31 63.37,30.23 53.47,20.32 46.74,20.32 46.61,20.19 46.61,17.62 43.81,14.86 43.81,9.78 49.28,9.78 49.28,5.97 41.78,5.97 38.23,9.53 38.23,17.78 40.64,20.19 40.64,30.35 39.37,31.62
GND3 on TOP (solid shape): 70.74,17.65 70.74,7.24 64.52,1.02 59.86,1.02 59.82,1.02 59.79,1.04 59.77,1.06 59.76,1.09 59.75,1.11 59.77,1.18 59.78,1.25 59.79,1.28 59.79,2.28 59.78,2.31 59.77,2.37 59.75,2.44 59.76,2.47 59.77,2.5 59.79,2.52 59.82,2.53 59.86,2.54 61.85,2.54 66.93,7.62 66.93,9.39 67.35,9.39 67.35,8.39 67.35,8.36 67.36,8.31 67.37,8.26 67.4,8.21 67.43,8.17 67.46,8.13 67.51,8.1 67.55,8.08 67.61,8.06 67.66,8.05 67.68,8.05 68.08,8.05 68.11,8.05 68.16,8.06 68.21,8.08 68.26,8.1 68.3,8.13 68.34,8.17 68.37,8.21 68.4,8.26 68.41,8.31 68.42,8.36 68.42,8.39 68.42,9.39 68.42,9.42 68.41,9.47 68.4,9.52 68.37,9.57 68.34,9.61 68.3,9.65 68.26,9.68 68.21,9.7 68.16,9.72 68.11,9.73 68.08,9.73 67.68,9.73 67.66,9.73 67.61,9.72 67.55,9.7 67.51,9.68 67.46,9.65 67.43,9.61 67.4,9.57 67.37,9.52 67.36,9.47 67.35,9.42 67.35,9.39 66.93,9.39 66.93,11.29 67.35,11.29 67.35,10.3 67.35,10.27 67.36,10.22 67.37,10.17 67.4,10.12 67.43,10.08 67.46,10.04 67.51,10.01 67.55,9.98 67.61,9.97 67.66,9.96 67.68,9.96 68.08,9.96 68.11,9.96 68.16,9.97 68.21,9.98 68.26,10.01 68.3,10.04 68.34,10.08 68.37,10.12 68.4,10.17 68.41,10.22 68.42,10.27 68.42,10.3 68.42,11.29 68.42,11.32 68.41,11.37 68.4,11.42 68.37,11.47 68.34,11.51 68.3,11.55 68.26,11.58 68.21,11.61 68.16,11.62 68.11,11.63 68.08,11.63 67.68,11.63 67.66,11.63 67.61,11.62 67.55,11.61 67.51,11.58 67.46,11.55 67.43,11.51 67.4,11.47 67.37,11.42 67.36,11.37 67.35,11.32 67.35,11.29 66.93,11.29 66.93,12.06 65.53,13.46 65.53,19.05 62.74,19.05 62.74,20.7 62.67,20.76 61.28,20.76 61.21,20.83 61.21,22.53 61.89,22.53 61.89,22.43 61.9,22.33 61.92,22.23 61.94,22.14 61.97,22.04 62.01,21.95 62.06,21.87 62.11,21.78 62.17,21.7 62.23,21.63 62.3,21.56 62.38,21.5 62.46,21.44 62.55,21.39 62.64,21.35 62.73,21.31 62.83,21.29 62.92,21.27 63.02,21.26 63.12,21.25 63.22,21.26 63.32,21.27 63.41,21.29 63.51,21.31 63.6,21.35 63.69,21.39 63.78,21.44 63.86,21.5 63.93,21.56 64,21.63 64.07,21.7 64.13,21.78 64.18,21.87 64.23,21.95 64.27,22.04 64.3,22.14 64.32,22.23 64.34,22.33 64.35,22.43 64.35,22.53 64.34,22.63 64.32,22.72 64.3,22.82 64.27,22.91 64.23,23.01 64.18,23.09 64.13,23.18 64.07,23.26 64,23.33 63.93,23.4 63.86,23.46 63.78,23.52 63.69,23.57 63.6,23.61 63.51,23.64 63.41,23.67 63.32,23.69 63.22,23.7 63.12,23.71 63.02,23.7 62.92,23.69 62.83,23.67 62.73,23.64 62.64,23.61 62.55,23.57 62.46,23.52 62.38,23.46 62.3,23.4 62.23,23.33 62.17,23.26 62.11,23.18 62.06,23.09 62.01,23.01 61.97,22.91 61.94,22.82 61.92,22.72 61.9,22.63 61.89,22.53 61.21,22.53 61.21,23.37 61.98,24.13 64.26,24.13
GND3 on BOTTOM: 36.83,9.27 41.02,5.08 49.91,5.08 50.55,5.71 50.55,10.16 51.82,11.43 69.09,11.43 79.76,22.1 79.76,0.25 40.26,0.25 36.83,3.68
GND3 on BOTTOM: 39.24,20.7 39.24,30.23 18.29,30.23 18.29,21.84 23.88,21.84 24,21.72 24,14.61 22.23,14.61 22.23,12.06 19.94,12.06 19.94,4.06 36.83,4.06 36.83,18.29
(no net) on TOP: 58.93,1.02 58.8,1.14 58.8,2.41 58.93,2.54 61.85,2.54 66.93,7.62 66.93,12.06 65.53,13.46 65.53,19.05 62.74,19.05 62.74,20.7 62.67,20.76 61.28,20.76 61.21,20.83 61.21,23.37 61.98,24.13 64.26,24.13 70.74,17.65 70.74,7.24 64.52,1.02
(no net) on TOP: 61.98,3.81 59.31,3.81 59.31,5.59 59.05,5.84 59.05,12.19 57.66,13.59 57.66,19.81 58.42,20.57 59.69,20.57 59.69,17.02 60.71,17.02 60.71,16 60.58,15.88 60.58,7.62 61.98,6.22
(no net) on TOP: 61.59,8.64 61.59,17.02 62.74,17.02 62.74,18.67 64.9,18.67 64.9,12.95 65.34,12.51 65.34,8.19 65.28,8.13 62.1,8.13
+V_RAIL on BOTTOM: 74.04,27.56 74.04,55.63 62.87,66.8 22.35,66.8 22.35,69.6 79.76,69.6 79.76,22.99 68.71,11.94 45.72,12.06 45.72,15.75 49.15,19.18 65.66,19.18
N20136 on TOP: 43.69,47.62 39.37,47.62 37.47,49.53 37.47,66.04 38.48,67.06 43.69,67.06 44.96,65.79 44.96,48.9
N20333 on TOP: 46.74,47.62 51.05,47.62 52.96,49.53 52.96,66.04 51.94,67.06 46.74,67.06 45.47,65.79 45.47,48.9
N24103 on TOP (solid shape): 64.9,16 64.85,15.91 64.75,15.91 64.72,15.92 64.69,15.92 62.17,15.92 62.08,15.89 62.04,15.8 62.04,14.18 62.08,14.09 62.17,14.05 64.69,14.05 64.72,14.05 64.75,14.06 64.85,14.06 64.9,13.97 64.9,12.95 65.34,12.51 65.34,8.19 65.28,8.13 62.1,8.13 61.9,8.34 61.87,8.45 61.97,8.51 63.06,8.51 63.15,8.55 63.18,8.64 63.18,11.18 63.15,11.27 63.06,11.3 61.66,11.3 61.65,11.3 61.61,11.32 61.59,11.35 61.59,17.02 62.74,17.02 62.74,18.67 64.9,18.67
